# Altium PCB 000.000.001 rev.1.PcbDoc
Units mm, origin at the board's own origin, x right, y up, seen from the top; angles counter-clockwise.
Board outline 111 x 55 mm, 2 copper layers (Top Layer, Bottom Layer), stack 1.571 mm thick; 65 components, 74 nets, 295 pads, 221 vias.
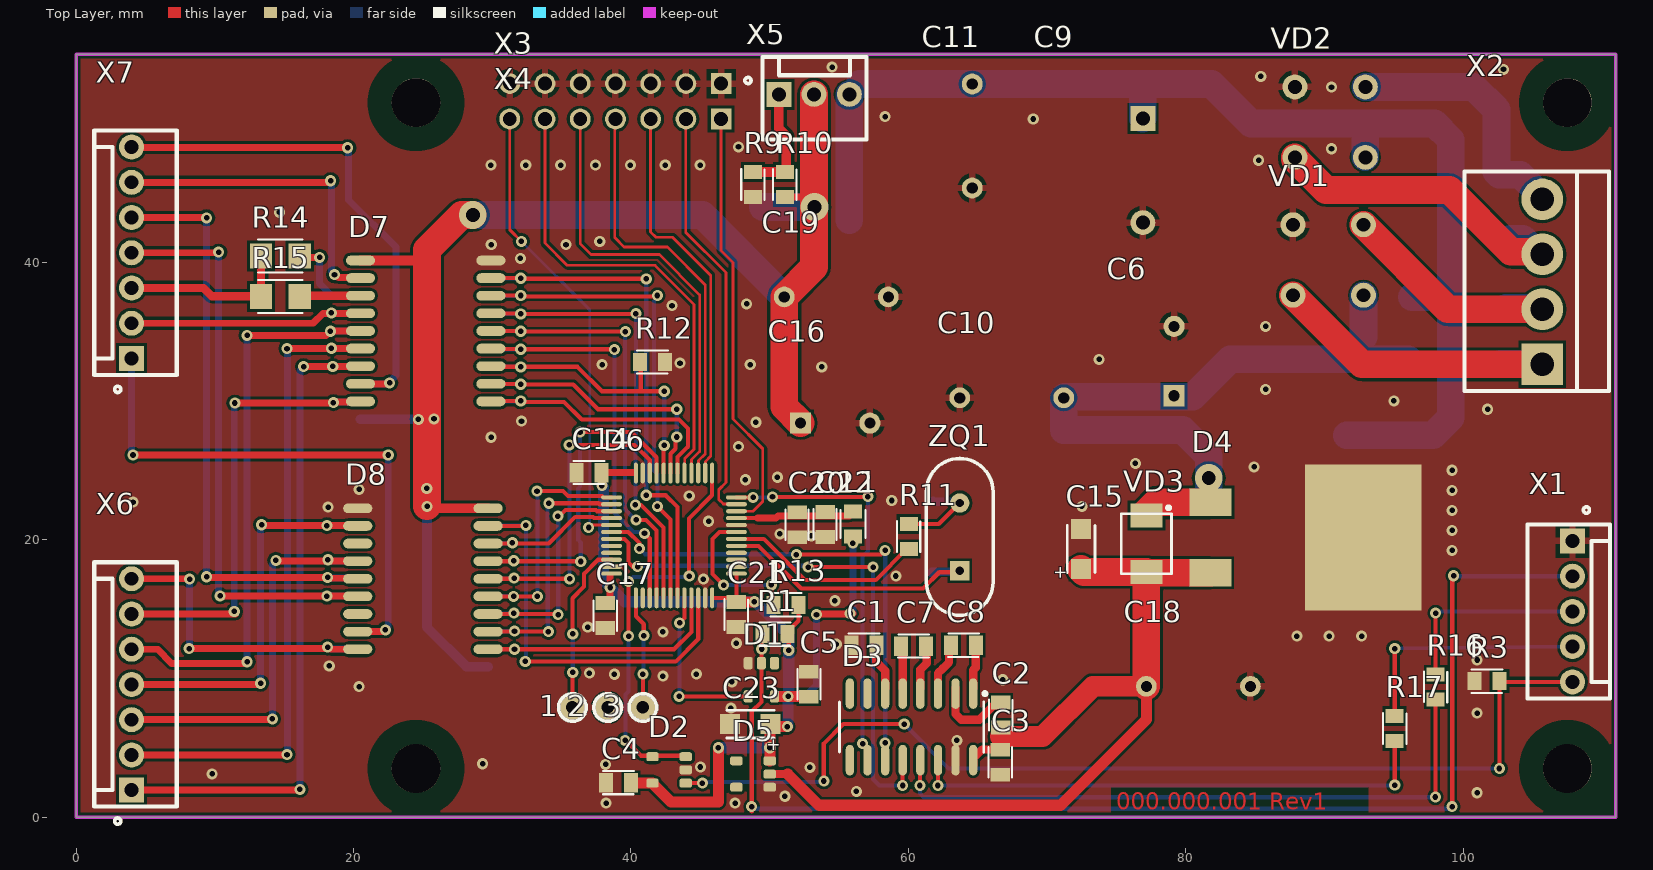
[diagram p0: Top Layer view]
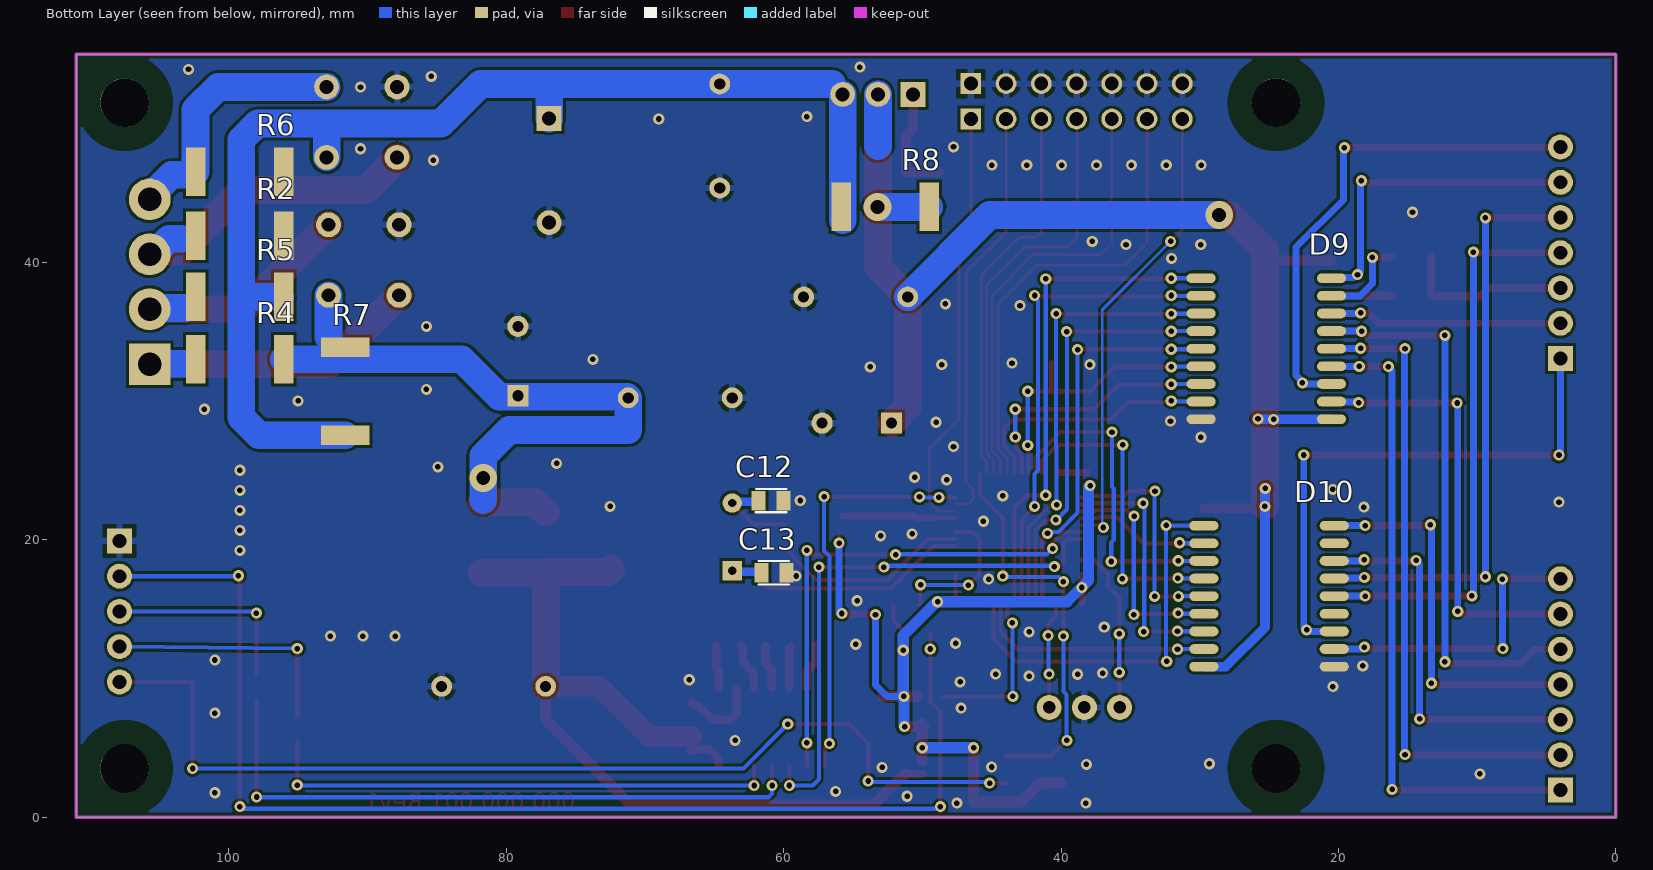
[diagram p1: Bottom Layer view, seen from below]
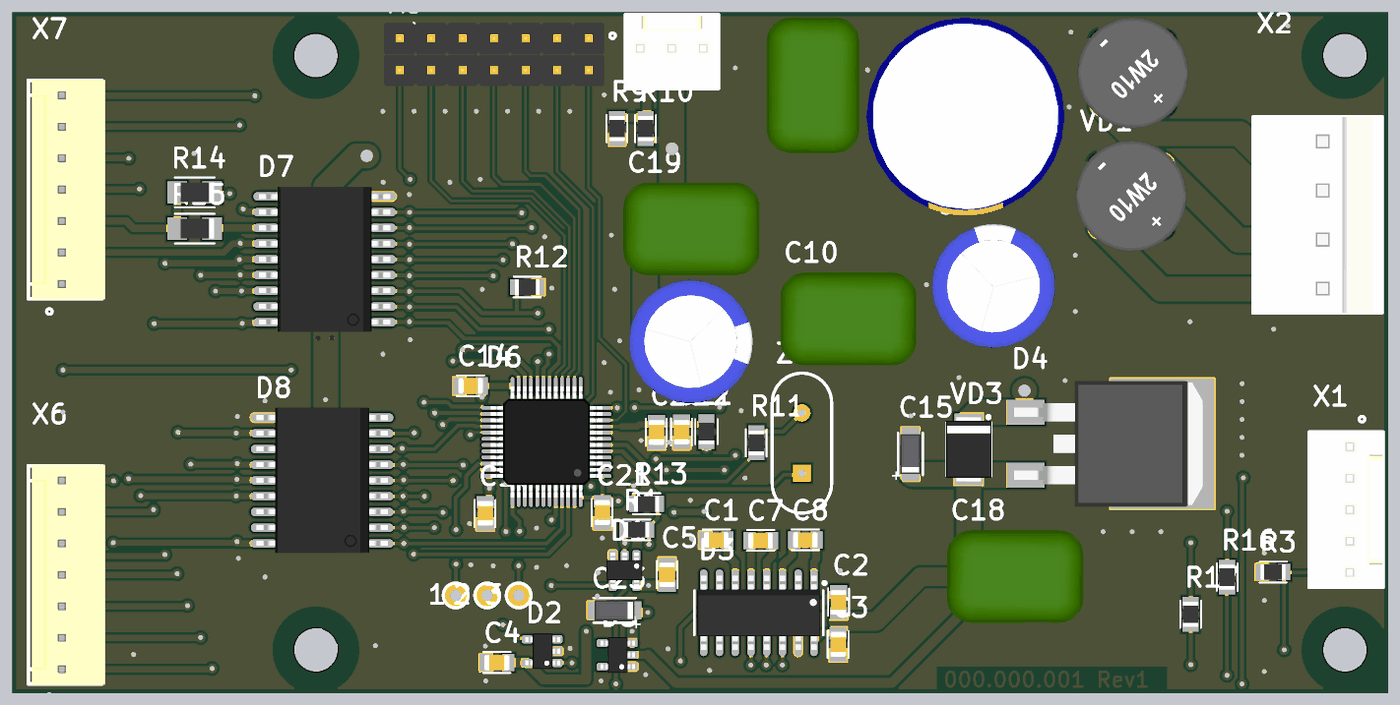
[diagram p2: 3D render of the assembled board from above, using the file's embedded part models]
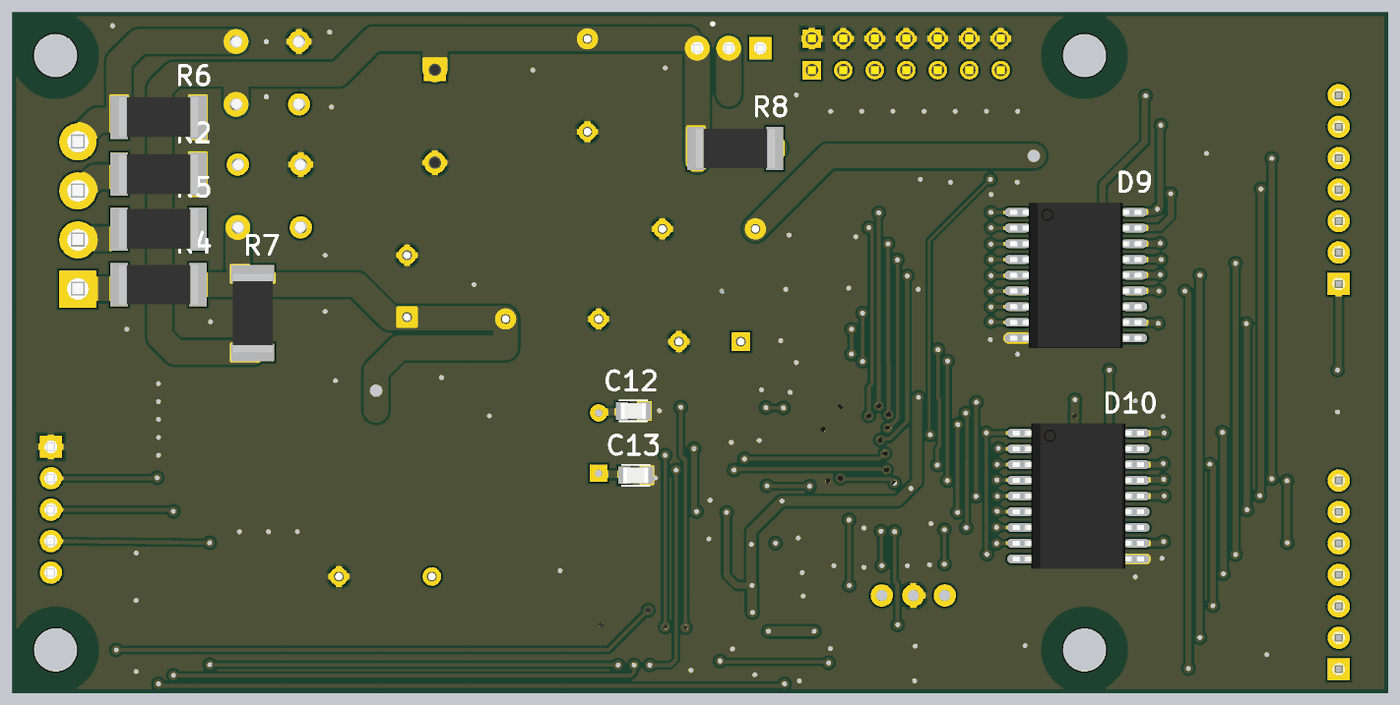
[diagram p3: 3D render of the assembled board from below, using the file's embedded part models]

## Layer stack, top to bottom
Top Solder: solder mask 0.0102, Solder Resist, Dk 3.5
Top Layer: signal copper 0.0356
Dielectric 1: dielectric 1.5, FR-4, Dk 4.8
Bottom Layer: signal copper 0.0356
Bottom Solder: solder mask 0.0102, Solder Resist, Dk 3.5

## Board outline
0,0 111,0 111,55 0,55

## Design rules (kind name [scope] priority, off if disabled: settings)
Clearance [All] p1: gap=0.2 ignorepadtopadclearanceinfootprint=FALSE except(0.3: Arc-Poly)
ComponentClearance [All] p1: gap=0 collisioncheckmode=3 verticalgap=0 showdistances=FALSE
Height [All] p1: minheight=0 maxheight=50 prefheight=12.7
PolygonConnect [All] p1: thpad.connectstyle=Relief thpad.reliefconductorwidth=0.5 thpad.reliefentries=4 thpad.polygonreliefangle="90 Angle" thpad.airgapwidth=0.3 smdpad.connectstyle=Direct smdpad.reliefconductorwidth=0.254 smdpad.reliefentries=4 smdpad.polygonreliefangle="90 Angle" smdpad.airgapwidth=0.254 via.connectstyle=Direct via.reliefconductorwidth=0.254 via.reliefentries=4 via.polygonreliefangle="90 Angle" via.airgapwidth=0.254
RoutingVias [All] p1: holewidth=0.4 width=0.8 viastyle="Through Hole" minholewidth=0.4 minwidth=0.8 maxholewidth=3 maxwidth=5
SolderMaskExpansion [All] p1: expansion=0.102
Width [All] p1: maxlimit=3 minlimit=0.2 preferedwidth=0.5
28 further rules are at their usual default settings.

## Components (designator, comment, footprint, x,y, rotation, side; value= is the part's Value field where it differs from the comment)
1 "=Value" PADROUND 35.775,7.9 r180 top
2 "=Value" PADROUND 38.315,7.9 r180 top
3 "=Value" PADROUND 40.855,7.9 r180 top
C1 "GRM21BR71H104KA01L (0805 X7R 0,1 мкФ ±10% 50 В)" CAP0805-125 56.8,12.375 r0 top
C2 "GRM21BR71H104KA01L (0805 X7R 0,1 мкФ ±10% 50 В)" CAP0805-125 66.65,7.35 r270 top
C3 "GRM21BR71E105KA99L (0805 X7R 1 мкФ ±10% 25 В)" CAP0805-125 66.625,3.95 r90 top
C4 "GRM21BR71H104KA01L (0805 X7R 0,1 мкФ ±10% 50 В)" CAP0805-125 39.1,2.475 r0 top
C5 "GRM21BR71H104KA01L (0805 X7R 0,1 мкФ ±10% 50 В)" CAP0805-125 52.825,9.575 r270 top
C6 "WLR102M1EG21 (1000 мкФ 25 В 10х21)" CAPR10x21 79.15,32.875 r270 top
C7 "GRM21BR71H104KA01L (0805 X7R 0,1 мкФ ±10% 50 В)" CAP0805-125 60.375,12.325 r0 top
C8 "GRM21BR71H104KA01L (0805 X7R 0,1 мкФ ±10% 50 В)" CAP0805-125 63.975,12.375 r0 top
C9 "TKR222M1VK25 (2200 мкФ 35 В 16х25)" CAPR16X25 76.9,46.6 r90 top
C10 "JFA02A104J (0,1 мкФ, 100 В, 5%)" JFA11x13x7.5 67.45,30.225 r0 top
C11 "JFA02A104J (0,1 мкФ, 100 В, 5%)" JFA11x13x7.5 64.6,49.1 r90 top
C12 "GRM2165C1H180JD01D (0805 NP0 18 пФ ±5% 50 В)" CAP0805-060_NP0 60.9,22.8 r180 bottom
C13 "GRM2165C1H180JD01D (0805 NP0 18 пФ ±5% 50 В)" CAP0805-060_NP0 60.7,17.6 r180 bottom
C14 "GRM21BR71H104KA01L (0805 X7R 0,1 мкФ ±10% 50 В)" CAP0805-125 36.975,24.825 r0 top
C15 "TECAP4.7/10VA10 ( тип А 4,7 мкФ 10 В ±10%)" 3216-18 72.45,19.325 r90 top
C16 "WLR102M1EG21 (1000 мкФ 25 В 10х21)" CAPR10X21 54.725,28.4 r180 top
C17 "GRM21BR71H104KA01L (0805 X7R 0,1 мкФ ±10% 50 В)" CAP0805-125 38.15,14.525 r90 top
C18 "JFA02A104J (0,1 мкФ, 100 В, 5%)" JFA11x13x7.5 80.9,9.425 r180 top
C19 "JFA02A104J (0,1 мкФ, 100 В, 5%)" JFA11x13x7.5 54.8,37.5 r180 top
C20 "GRM21BR71E105KA99L (0805 X7R 1 мкФ ±10% 25 В)" CAP0805-125 51.975,21.075 r90 top
C21 "GRM21BR71H104KA01L (0805 X7R 0,1 мкФ ±10% 50 В)" CAP0805-125 47.6,14.6 r90 top
C22 "GRM21BR71H104KA01L (0805 X7R 0,1 мкФ ±10% 50 В)" CAP0805-125 54,21.1 r90 top
C23 "TECAP4.7/10VA10 ( тип А 4,7 мкФ 10 В ±10%)" 3216-18 48.6,6.7 r180 top
D1 "SN74AHC1G14DRLR" SOT23-5 49.4,9.9 r270 top value=SN74LVC1G04DBVR
D2 "LMV321ILT" SOT23-5 42.75,3.4 r180 top
D3 "ST232BDR" SO16_N 60.225,6.5 r270 top
D4 "L78M05ABDT-TR" D2PAK 87.275,20.15 r270 top
D5 "MC78LC33NTRG" SOT23-5 48.8,3.1 r180 top
D6 "STM32F103C8T6" LQFP-48 43.1,20.3 r180 top
D7 "ULN2803ADWR" SOP-18 25.2,35.045 r180 top
D8 "TD62783AFG" SOP-18 25,17.18 r180 top
D9 "ULN2803ADWR" SOP-18 25.2,33.765 r180 bottom
D10 "TD62783AFG" SOP-18 25,15.925 r180 bottom
L1 "LQM21PN4R7NGR (0805 4,7 мкГн 0,8 А 288 мОм)" LQM21-G 56,21.125 r90 top
R1 "RC0805FR-0710KL (0805 10 кОм ±1%)" RES0805-050 50.375,13.2 r180 top
R2 "RC2512FR-070RL (1206 0 Ом)" RES2512-055 99.2,41.92 r0 bottom
R3 "RC0805FR-07150RL (0805 150 Ом ±1%)" RES0805-050 101.7,9.8 r180 top
R4 "RC2512FR-070RL (1206 0 Ом)" RES2512-055 99.2,33 r0 bottom
R5 "RC2512FR-070RL (1206 0 Ом)" RES2512-055 99.2,37.5 r0 bottom
R6 "RC2512FR-070RL (1206 0 Ом)" RES2512-055 99.2,46.52 r0 bottom
R7 "RC2512FR-070RL (1206 0 Ом)" RES2512-055 91.6,30.7 r90 bottom
R8 "RC2512FR-070RL (1206 0 Ом)" RES2512-055 52.675,44 r180 bottom
R9 "RC0805FR-071K6L (0805 1,6 кОм ±1)" RES0805-050 48.8,45.6 r90 top
R10 "RC0805FR-07150RL (0805 150 Ом ±1%)" RES0805-050 51.1,45.6 r90 top
R11 "RC0805JR-0722R (0805 22 Ом ±5%)" RES0805-050 60.025,20.225 r90 top
R12 "RC0805FR-0710KL (0805 10 кОм ±1%)" RES0805-050 41.55,32.8 r0 top
R13 "RC0805FR-0710KL (0805 10 кОм ±1%)" RES0805-050 51.175,15.3 r0 top
R14 "RC1206FR-071KL (1206 1 кОм ±1%)" RES1206-055 14.725,40.45 r180 top
R15 "RC1206FR-071KL (1206 1 кОм ±1%)" RES1206-055 14.725,37.525 r180 top
R16 "RC0805FR-07240RL (0805 240 Ом ±1%)" RES0805-050 97.993,9.372 r270 top
R17 "RC0805FR-07240RL (0805 240 Ом ±1%)" RES0805-050 95.047,6.375 r270 top
VD1 "2W10G-E4/51" 2W10 90.26,40.16 r180 top
VD2 "2W10G-E4/51" 2W10 90.4,50.1 r180 top
VD3 "S1G" DO-214AA 77.15,19.7 r270 top
X1 "DS1070-5MVV6 (WF-05)" WF-05 107.875,14.825 r270 top
X2 "DS1072-4MVT6 (PWL-4)" PWL-4 105.7,38.591 r270 top
X3 "Соединитель штыревой PLS-7" PLS-2.54-7 46.5,52.876 r270 top
X4 "Соединитель штыревой PLS-7" PLS-2.54-7 46.5,50.325 r270 top
X5 "Connector 3" WF-03 53.2,52.1 r0 top value="DS1070-3MVV6 (WF-03)"
X6 "#NAME?" WF-07 4,9.56 r90 top value="DS1070-7MVV6 (WF-7)"
X7 "#NAME?" WF-07 4,40.68 r90 top value="DS1070-7MVV6 (WF-7)"
ZQ1 "8.000MHzHC-49US" KX-3H_spacer 63.7,20.2 r90 top

## Footprints (in the part's own frame and the unit in brackets; to place one, negate y for a bottom-side part, rotate by r counter-clockwise, add the part's x,y. Pads: shape width x height; smd on the part's side, far side on the other; paste and mask are expansions set on the pad)
2W10 [mm]
  round 1.8 hole 1: +(-2.54,2.54) -(2.54,-2.54) ~A(2.54,2.54) ~B(-2.54,-2.54)
  body extent -4.5,-4.5 4.5,4.5, height 7.3
3216-18 [mm] "Case A Tantalum"
  rect 1.45x1.45 smd: 1(-1.45,0) 2(1.45,0)
  silkscreen extent -1.7,-1 1.7,1, body extent -1.6,-0.8 1.6,0.8, height 1.53
CAP0805-060_NP0 [mm] "Chip capacitor, Body 2.0x1.2mm"
  rect 1x1.4 smd: 1(-0.9,0) 2(0.9,0)
  silkscreen extent -1.11,-0.83 1.1,0.85, body extent -1,-0.63 1,0.62, height 0.52
CAP0805-125 [mm] "Chip capacitor, Body 2.0x1.2mm 1.25 mm thickness"
  rect 1x1.4 smd: 1(-0.9,0) 2(0.9,0)
  silkscreen extent -1.11,-0.83 1.1,0.85, body extent -1,-0.63 1,0.63, height 1.42
CAPR10x21 [mm] "Pitch 5.0"
  rect 1.524x1.524 hole 0.8: 1(2.5,0)
  round 1.524 hole 0.8: 2(-2.5,0)
  body extent -5,-5 5,5, height 21.05
CAPR10X21 [mm] "Pitch 5.0"
  rect 1.524x1.524 hole 0.8: 1(2.5,0)
  round 1.524 hole 0.8: 2(-2.5,0)
  body extent -5,-5 5,5, height 21.05
CAPR16X25 [mm] "Pitch 7.5"
  rect 1.8x1.8 hole 1: 1(3.75,0)
  round 1.8 hole 1: 2(-3.75,0)
  body extent -8.01,-8 8,8, height 25.51
D2PAK [mm] "D2-PAK/TO-263-AB; 3 Leads (1 Cropped); Body 15.5 (inc. leads) x 10.5 mm (LxW max)"
  rect 2x3 smd: 1(-2.54,-5.5) 3(2.54,-5.5)
  rect 10.55x8.4 smd: 2(0,5.5)
  body extent -5.08,-6.5 5.08,8.76, height 4.88
DO-214AA [mm] "Diode"
  rect 1.72x2.3 smd: A(2.035,0) K(-2.035,0)
  silkscreen extent -2.72,-1.81 2.16,1.81, body extent -2.65,-1.85 2.65,1.85, height 2.2
JFA11x13x7.5 [mm] "JFA Mylar capacitor"
  round 1.5 hole 0.8: 1(-3.75,0) 2(3.75,0)
  body extent -5.5,-3.75 5.5,3.75, height 15
KX-3H_spacer [mm] "Quartz resonator with spacer"
  rect 1.4x1.4 hole 0.6: 1(-2.44,0)
  round 1.4 hole 0.6: 2(2.44,0)
  silkscreen extent -5.65,-2.4 5.65,2.4, body extent -5.68,-2.5 5.68,2.5, height 4.6
LQFP-48 [mm]
  oval 1.5x0.3 smd: 1(-4.5,2.75) 2(-4.5,2.25) 3(-4.5,1.75) 4(-4.5,1.25) 5(-4.5,0.75) 6(-4.5,0.25) 7(-4.5,-0.25) 8(-4.5,-0.75) 9(-4.5,-1.25) 10(-4.5,-1.75) 11(-4.5,-2.25) 12(-4.5,-2.75) 25(4.5,-2.75) 26(4.5,-2.25) 27(4.5,-1.75) 28(4.5,-1.25) 29(4.5,-0.75) 30(4.5,-0.25) 31(4.5,0.25) 32(4.5,0.75) 33(4.5,1.25) 34(4.5,1.75) 35(4.5,2.25) 36(4.5,2.75)
  oval 0.3x1.5 smd: 13(-2.75,-4.5) 14(-2.25,-4.5) 15(-1.75,-4.5) 16(-1.25,-4.5) 17(-0.75,-4.5) 18(-0.25,-4.5) 19(0.25,-4.5) 20(0.75,-4.5) 21(1.25,-4.5) 22(1.75,-4.5) 23(2.25,-4.5) 24(2.75,-4.5) 37(2.75,4.5) 38(2.25,4.5) 39(1.75,4.5) 40(1.25,4.5) 41(0.75,4.5) 42(0.25,4.5) 43(-0.25,4.5) 44(-0.75,4.5) 45(-1.25,4.5) 46(-1.75,4.5) 47(-2.25,4.5) 48(-2.75,4.5)
  body extent -4.5,-4.5 4.5,4.5, height 1.5
LQM21-G [mm] "Inductor"
  rect 1x1.3 smd: 1(-0.9,0) 2(0.9,0)
  silkscreen extent -1,-0.9 1,0.9, body extent -1,-0.62 1,0.63, height 0.82
PADROUND [mm] "Pad Round"
  round 1.8 hole 0.9: 1(0,0)
  silkscreen extent -1,-1 1,1
PLS-2.54-7 [mm]
  rect 1.5x1.5 hole 1: 1(0,0)
  round 1.5 hole 1: 2(0,-2.54) 3(0,-5.08) 4(0,-7.62) 5(0,-10.16) 6(0,-12.7) 7(0,-15.24)
  body extent -1.27,-16.51 1.27,1.27, height 8.54
PWL-4 [mm] "3.96"
  rect 3x3 hole 1.7: 1(5.94,0)
  round 3 hole 1.7: 2(1.98,0) 3(-1.98,0) 4(-5.94,0)
  silkscreen extent -7.96,-5.6 7.88,4.8, body extent -7.95,-5.59 7.89,4.81, height 13.8
RES0805-050 [mm] "Chip Resistor, Body 2.0x1.2mm, IPC High Density"
  rect 1x1.3 smd: 1(-0.9,0) 2(0.9,0)
  silkscreen extent -1.11,-0.83 1.1,0.85, body extent -1,-0.63 1,0.62, height 0.42
RES1206-055 [mm] "Chip resistor"
  rect 1.6x1.8 smd: 1(-1.4,0) 2(1.4,0)
  silkscreen extent -1.6,-1.2 1.6,1.2, body extent -1.55,-0.8 1.55,0.8, height 0.47
RES2512-055 [mm] "Resistor"
  rect 1.4x3.5 smd: 1(-3.175,0) 2(3.175,0)
  body extent -3.18,-1.6 3.17,1.6, height 0.57
SO16_N [mm] "SOIC, 16-Leads, Body 9.9x3.9mm, Pitch 1.27mm, IPC Medium Density"
  oval 2.2x0.6 smd: 1(-2.4,4.445) 2(-2.4,3.175) 3(-2.4,1.905) 4(-2.4,0.635) 5(-2.4,-0.635) 6(-2.4,-1.905) 7(-2.4,-3.175) 8(-2.4,-4.445) 9(2.4,-4.445) 10(2.4,-3.175) 11(2.4,-1.905) 12(2.4,-0.635) 13(2.4,0.635) 14(2.4,1.905) 15(2.4,3.175) 16(2.4,4.445)
  silkscreen extent -2.52,-5.2 1.8,5.42, body extent -3,-4.96 3,4.96, height 1.54
SOP-18 [mm]
  oval 2.1x0.7 smd: 1(-4.7,5.08) 2(-4.7,3.81) 3(-4.7,2.54) 4(-4.7,1.27) 5(-4.7,0) 6(-4.7,-1.27) 7(-4.7,-2.54) 8(-4.7,-3.81) 9(-4.7,-5.08) 10(4.7,-5.08) 11(4.7,-3.81) 12(4.7,-2.54) 13(4.7,-1.27) 14(4.7,0) 15(4.7,1.27) 16(4.7,2.54) 17(4.7,3.81) 18(4.7,5.08)
  body extent -5.3,-5.87 5.3,5.88, height 2.57
SOT23-5 [mm]
  rrect50% 0.9x0.65 smd: 1(-1.2,0.95) 2(-1.2,0) 3(-1.2,-0.95) 4(1.2,-0.95) 5(1.2,0.95)
  body extent -1.45,-1.45 1.35,1.45, height 1.37
WF-03 [mm] "2.54"
  rect 1.8x1.8 hole 1: 1(-2.54,0)
  round 1.8 hole 1: 2(0,0) 3(2.54,0)
  silkscreen extent -4.99,-3.25 3.77,2.7, body extent -3.73,-3.2 3.77,2.6, height 11.62
WF-05 [mm] "2.54"
  rect 1.8x1.8 hole 1: 1(-5.08,0)
  round 1.8 hole 1: 2(-2.54,0) 3(0,0) 4(2.54,0) 5(5.08,0)
  silkscreen extent -7.53,-3.25 6.27,2.7, body extent -6.35,-3.17 6.35,2.63, height 11.64
WF-07 [mm] "2.54"
  rect 1.8x1.8 hole 1: 1(-7.62,0)
  round 1.8 hole 1: 2(-5.08,0) 3(-2.54,0) 4(0,0) 5(2.54,0) 6(5.08,0) 7(7.62,0)
  silkscreen extent -10.07,-3.25 8.81,2.7, body extent -8.89,-3.5 8.89,2.4, height 11.48

## Part data
1 2 3: library part Point
C1 C2 C3 C4 C5 C7 C8 C10 C11 C12 C13 C14 C17 C18 C19 C20 C21 C22: library part Capacitor
  C1 C2 C3 C4 C5 C7 C8 C14 C17 C20 C21 C22: Cost=7, Visible="0,1 мк"
  C10 C11 C18 C19: Cost=6, Visible="0,1 мк"
  C12 C13: Cost=6, Visible=18
C6 C9 C15 C16 C23: library part CAP_POL
  C6 C16: Cost=16, Visible="1000 мк"
  C9: Cost=40, Visible="2200 мк"
  C15 C23: Cost=8, Visible="4,7 мк"
D4: library part LM7805CV, Cost=15
D5: library part MC78LC00
D7 D9: library part ULN2803, Cost=55
D8 D10: library part UTC62783, Cost=47
L1: library part L, Cost=14, Visible="4,7 мкГн"
R1 R2 R3 R4 R5 R6 R7 R8 R9 R10 R11 R12 R13 R14 R15 R16 R17: library part Resistor
  R1 R12 R13: Cost=0.9, Visible="10 к"
  R2 R4 R5 R6 R7 R8: Cost=0,9, Visible=0
  R3 R10: Cost=0.9, Visible=150
  R9: Cost=0,9, Visible="1.6 k"
  R11: Cost=0.9, Visible=22
  R14 R15: Cost=0.8, Visible="1 к"
  R16 R17: Cost=0.9, Visible=240
VD1 VD2: library part "Diode bridge", "Diode", Cost=27
VD3: library part Diode, "Diode", Cost=3
X1: library part "Connector 5", Cost=6
X2: library part "Connector 4", Cost=6
X3 X4: library part PLS-7
X6 X7: library part Connector_7, Cost=6
ZQ1: library part Quartz, Cost=15
D1: Cost=6
D2: Cost=14
D3: Cost=22
D6: Cost=220
X5: Cost=5

## Free pads (board coordinates)
  round 3.5 hole 3.5 unplated: MH(24.5,3.5) MH(24.5,51.5) MH(107.5,3.5) MH(107.5,51.5)

## Via types
v1: diameter 0.8, hole 0.4, Top Layer to Bottom Layer, tented both sides, 218 vias
v2: diameter 2, hole 1, Top Layer to Bottom Layer, tented both sides, 3 vias

## Nets (pads, with @x,y where several pads share a name; then routed paths per layer and width w, separated by ;. In a path a pad name is that pad's centre, name@x,y a point inside that pad or via, vN(x,y) a via of type N, cw(c..) or ccw(c..) an arc to the next point about the centre after c; other vN are vias at no path point)
3,3: C4.2 C5.2 C14.2 C17.2 C21.2 C23.1 D1.5 D2.5 D5.3 D6.1 D6.24 D6.36 D6.48 L1.1 R1.1 R13.2 | length 78.4
  Top Layer w0.3: D6.24 D6.24@40.35,24.825 ; D6.48 47.3,15.8 C21.2 D6.1 ; v1(51.375,12.025) 51.375,13.1 R1.1 51.275,13.35 52.075,14.15 R13.2 ; v1(56,19.75) L1.1
  Top Layer w0.5: C14.2@38.125,24.825 D6.24@40.25,24.825 ; D6.36@38.475,17.425 38.475,15.45 C17.2@38.5,15.425 ; v1(53.375,14.6) 53.413,14.637 55.963,14.637 v1@56,14.675
  Top Layer w0.8: C4.2 40.013,2.462 41.537,2.462 D2.5 41.55,2.425 42.875,1.1 46.3,1.1 v1(46.3,5) ; C21.2 v1@48.9,15.5 ; D5.3 50.025,4.075 C23.1@50.025,6.525 ; C23.1 C23.1@50.025,6.675 ; D1.5 v1(51.325,8.7) C5.2@52.825,8.7 ; v1(51.275,6.525) C23.1@50.025,6.525 ; C23.1@50.025,6.525 49.875,6.525 C23.1@50.025,6.675 ; C23.1@50.025,6.525 C23.1@50.025,6.675
  Bottom Layer w0.5: v1(51.325,8.7) 52.55,8.7 53.375,9.525 v1(53.375,14.6) ; v1@56,14.675 v1(56,19.75)
  Bottom Layer w0.8: v1(37.9,23.9) 38.025,23.775 38.025,17.05 39.55,15.525 v1(48.9,15.525) 48.925,15.525 51.375,13.075 v1(51.375,12.025) 51.375,8.75 v1(51.325,8.7) v1@51.325,6.525 ; v1(46.3,5) v1(50,5)
  other v1: 55.8,14.675 38.5,16.55
5,0: C2.2 C3.2 C15.1 C18.2 D3.16 D4.3 D5.2 VD3.A | length 66.8
  Top Layer w0.6: D5.2 51.3,3.1 ; D3.16@64.67,3.7 D3.16 64.67,4.225 65.32,4.875 66.6,4.875 C3.2
  Top Layer w0.8: 51.3,3.1 53.55,0.85 70.975,0.85 77.15,7.025 C18.2 ; C3.2 66.637,4.862 66.637,5.8
  Top Layer w1.5: 66.637,5.8 69.675,5.8 73.3,9.425 C18.2
  Top Layer w2: C15.1 72.66,17.665 VD3.A VD3.A@77.15,17.624 ; VD3.A@76.775,17.625 VD3.A@77.15,17.624 ; C18.2 VD3.A@77.15,17.624 ; D4.3 VD3.A@77.15,17.624
A: D7.15 D9.14 X6.2 | length 47.9
  Top Layer w0.5: X6.2 v1@15.2,4.48 ; v1(15.2,33.765) 15.205,33.77 20.495,33.77 D7.15
  Bottom Layer w0.5: v1(15.2,4.5) 15.25,4.55 15.25,33.715 v1(15.2,33.765) ; v1(18.4,33.8) 18.417,33.783 20.483,33.783 D9.14
AN0: D8.18 D10.11 X6.7 | length 23.6
  Top Layer w0.5: X6.7 v1@8.13,17.18 ; v1(8.15,12.15) 18.025,12.15 v1(18.125,12.25) 18.206,12.25 18.356,12.1 D8.18
  Bottom Layer w0.5: v1(8.15,12.15) 8.175,12.175 v1(8.175,17.15) ; v1(18.125,12.25) 18.206,12.25 18.341,12.115 D10.11
AN1: D8.11 D10.18 X6.4 | length 30.1
  Top Layer w0.5: X6.4 v1@13.21,9.56 ; v1@13.3,9.56 v1@13.21,9.56 ; v1(13.3,9.65) v1@13.21,9.56 ; v1@13.375,21.028 v1@13.422,21.028 ; v1(13.375,21.075) v1@13.422,21.028 ; D8.11 20.262,21.028 v1@13.422,21.028
  Bottom Layer w0.5: v1(13.3,9.65) 13.3,21 v1(13.375,21.075) ; v1(18.075,21.015) 20.29,21.015 D10.18
AN2: D8.13 D10.16 X6.3 | length 29.8
  Top Layer w0.5: X6.3 14.095,7.02 v1(14.15,7.075) ; v1@14.4,18.475 v1@14.425,18.475 ; v1(14.4,18.5) v1@14.425,18.475 ; D8.13 20.275,18.475 v1@14.425,18.475
  Bottom Layer w0.5: v1(14.15,7.075) 14.15,18.25 v1(14.4,18.5) ; v1(18.15,18.55) 18.235,18.465 D10.16
AN3: D8.14 D10.15 X7.5 | length 44.3
  Top Layer w0.5: X7.5 v1@9.225,43.22 ; v1@9.38,43.22 v1(9.4,43.2) ; v1@9.4,17.275 v1(18.125,17.275) 18.182,17.218 20.262,17.218 D8.14
  Bottom Layer w0.5: v1(9.4,17.325) v1(9.4,43.2) ; v1(18.125,17.275) 18.167,17.233 20.262,17.233 D10.15
AN4: D8.15 D10.14 X7.4 | length 43.3
  Top Layer w0.5: X7.4 v1@10.23,40.68 ; v1@10.275,40.68 v1@10.23,40.68 ; v1(10.275,40.725) v1@10.23,40.68 ; v1@10.375,15.93 v1@10.395,15.93 ; v1(10.375,15.95) v1@10.395,15.93 ; D8.15 20.28,15.93 v1@10.395,15.93
  Bottom Layer w0.5: v1(10.275,40.725) 10.275,16.05 v1(10.375,15.95) ; v1(18.075,15.925) D10.14
AN5: D8.17 D10.12 X7.1 | length 42.2
  Top Layer w0.5: v1(4.1,26.1) v1(22.5,26.1) ; D8.17 22.17,13.37 v1(22.3,13.5)
  Bottom Layer w0.5: X7.1 4,26.2 v1(4.1,26.1) ; D10.12 22.185,13.385 v1(22.3,13.5) 22.5,13.7 v1(22.5,26.1)
ANODE0: D6.45 D8.1 D10.8 | length 19.5
  Top Layer w0.3: D8.1 v1(31.6,12.1) 43.1,12.1 44.35,13.35 D6.45
  Bottom Layer w0.3: D10.8 29.707,12.107 31.593,12.107 v1(31.6,12.1)
ANODE1: D6.46 D8.8 D10.1 | length 31.4
  Top Layer w0.3: D8.8 v1@32.39,20.99 ; v1(32.375,11.225) 43.23,11.225 44.85,12.845 44.85,14.312 D6.46 ; v1@32.425,20.99 v1@32.39,20.99 ; v1(32.425,21.025) v1@32.39,20.99
  Bottom Layer w0.3: D10.1 29.71,21.015 32.415,21.015 v1(32.425,21.025) 32.425,11.275 v1(32.375,11.225)
ANODE2: D6.21 D8.6 D10.3 | length 25
  Top Layer w0.3: D8.6 29.713,18.438 36.362,18.438 v1(36.375,18.425) ; v1@36.7,27.75 40.037,27.75 41.85,25.937 D6.21
  Bottom Layer w0.3: D10.3 31.54,18.465 v1(31.55,18.475) ; v1@36.325,18.475 36.375,18.525 36.375,19.799 36.201,19.973 36.201,23.696 36.325,23.821 v1(36.325,27.75)
ANODE3: D6.22 D8.5 D10.4 | length 24.6
  Top Layer w0.3: D8.5 35.57,17.18 v1(35.575,17.175) ; v1(35.55,26.825) 40.255,26.825 41.35,25.73 D6.22
  Bottom Layer w0.3: D10.4 29.715,17.21 31.56,17.21 v1(31.575,17.225) ; v1(35.55,26.825) 35.563,26.812 35.563,17.187 v1(35.575,17.175)
ANODE4: D6.25 D8.4 D10.5 | length 18.6
  Top Layer w0.3: D8.4 v1(31.54,15.91) v1(33.25,15.91) ; v1(33.225,23.5) 35.1,23.5 35.45,23.15 37.9,23.15 38,23.05 D6.25
  Bottom Layer w0.3: D10.5 31.525,15.925 v1(31.54,15.91) ; v1(33.225,23.5) 33.25,23.475 v1(33.25,15.91)
ANODE5: D6.26 D8.2 D10.7 | length 20.1
  Top Layer w0.3: D8.2 34.045,13.37 v1(34.05,13.375) ; v1(34.075,22.625) 34.076,22.626 37.676,22.626 37.752,22.55 D6.26
  Bottom Layer w0.3: D10.7 29.708,13.393 31.592,13.393 v1(31.6,13.4) ; v1(34.05,13.375) 34,13.425 34,14.913 34,18.639 33.975,18.664 33.975,22.39 34.075,22.49 v1(34.075,22.625)
ANODE6: D6.27 D8.3 D10.6 | length 18.1
  Top Layer w0.3: D8.3 34.71,14.64 v1(34.75,14.6) ; v1(34.725,21.7) 34.86,21.7 35.286,22.126 37.469,22.126 37.545,22.05 D6.27
  Bottom Layer w0.3: D10.6 31.515,14.655 v1(31.56,14.7) ; v1(34.725,21.7) 34.75,21.675 v1(34.75,14.6)
ANODE7: D6.28 D8.7 D10.2 | length 11.5
  Top Layer w0.3: D8.7 31.45,19.72 34.07,19.72 35.976,21.626 37.261,21.626 37.337,21.55 D6.28
  Bottom Layer w0.3: D10.2 31.41,19.735 v1(31.45,19.775)
B: D7.16 D9.13 X6.1 | length 48.9
  Top Layer w0.5: X6.1 16.065,1.94 v1(16.125,2) ; v1(16.4,32.478) 16.414,32.491 v1(18.5,32.491) 20.486,32.491 D7.16
  Bottom Layer w0.5: v1(16.125,2) 16.125,32.203 v1(16.4,32.478) ; v1(18.5,32.491) 18.502,32.493 20.498,32.493 D9.13
BOOT: D1.2 R1.2 X1.2 | length 89
  Top Layer w0.3: v1@48.7,0.4 48.7,7.6 49.4,8.3 D1.2 49.4,13.125 R1.2 ; v1@99.2,0.7 99.2,17.3 v1(99.3,17.4)
  Bottom Layer w0.3: v1@48.7,0.6 v1@99.2,0.6 ; v1(99.3,17.4) 99.335,17.365 X1.2
  other v1: 48.7,0.75 99.2,0.75 49.425,12.115
BOOT0: D1.4 D6.44 | length 12.2
  Top Layer w0.3: v1(43.475,8.7) D1.4 ; v1(43.5,14) 43.85,14.35 D6.44
  Bottom Layer w0.3: v1(43.475,8.7) 43.5,8.725 v1(43.5,14)
C: D7.13 D9.16 X7.2 | length 18.9
  Top Layer w0.5: X7.2 17.075,35.6 17.79,36.315 D7.13
  Bottom Layer w0.5: v1(18.4,36.35) 18.445,36.305 D9.16
CATH1: D6.18 D7.1 D9.8 | length 20.5
  Top Layer w0.3: D7.1 29.917,29.983 32.033,29.983 v1(32.05,30) ; v1@32.1,29.92 35.18,29.92 36.45,28.65 43.45,28.65 44.1,28 44.1,26.7 43.35,25.95 D6.18
  Bottom Layer w0.3: D9.8 v1@31.895,29.955 ; v1@32.255,29.955 v1@32.3,30
CATH2: D6.19 D7.2 D9.7 | length 20.8
  Top Layer w0.3: D7.2 29.918,31.218 32.032,31.218 v1(32.05,31.2) ; v1@32.1,31.19 35.835,31.19 37.625,29.4 v1@43.1,29.4 ; D6.19 42.85,26.189 43.211,26.55 43.211,27.311 v1(43.3,27.4)
  Bottom Layer w0.3: D9.7 29.913,31.213 v1@31.945,31.213 ; v1@32.287,31.213 v1@32.3,31.2 ; v1@43.1,29.4 43.3,29.2 v1(43.3,27.4)
  other v1: 43.3,29.4
CATH3: D6.20 D7.3 D9.6 R12.1 | length 22.9
  Top Layer w0.3: D7.3@30.3,32.46 v1@31.975,32.46 ; v1(32.05,32.46) 36.14,32.46 37.9,30.7 40.7,30.7 ; R12.1 40.7,32.75 40.7,30.7 ; D6.20 42.35,26.75 v1(42.4,26.8) ; v1(42.4,30.7) 40.7,30.7
  Bottom Layer w0.3: D9.6 29.918,32.478 v1@31.957,32.478 ; v1@32.282,32.478 v1@32.3,32.46 ; v1(42.4,26.8) v1(42.4,30.7)
CATH4: D6.39 D7.4 D9.5 | length 30.3
  Top Layer w0.3: D7.4 29.925,33.75 32.025,33.75 v1(32.05,33.725) ; v1@32.1,33.73 38.77,33.73 v1(38.8,33.7) ; v1(40.975,20.45) 41.35,20.075 D6.39
  Bottom Layer w0.3: D9.5 29.94,33.725 v1@31.9,33.725 ; v1(38.8,33.7) 38.8,21.939 40.194,20.546 40.879,20.546 v1(40.975,20.45)
CATH5: D6.40 D7.5 D9.4 | length 32.3
  Top Layer w0.3: D7.5 29.91,35.035 32.04,35.035 v1(32.05,35.025) ; v1@32.1,35 v1(39.6,35) ; v1(40.375,21.425) 41.075,21.425 41.85,20.65 D6.40
  Bottom Layer w0.3: D9.4 v1@31.94,35.035 ; v1@32.29,35.035 v1@32.3,35.025 ; v1(39.6,35) 39.57,34.97 39.57,22.189 40.334,21.425 v1(40.375,21.425)
CATH6: D6.41 D7.6 D9.3 | length 34.2
  Top Layer w0.3: D7.6 29.923,36.293 v1@32.028,36.293 ; v1(32.05,36.27) v1@32.3,36.27 ; v1@32.277,36.293 v1@32.3,36.27 ; v1(40.32,22.5) 40.725,22.5 42.35,20.875 D6.41 ; v1(40.35,36.3) 40.32,36.27 v1@32.3,36.27
  Bottom Layer w0.3: D9.3 29.918,36.288 v1@32.032,36.288 ; v1@32.282,36.288 v1@32.3,36.27 ; v1(40.32,22.5) 40.32,26.72 40.35,26.75 v1(40.35,36.3)
CATH7: D6.42 D7.7 D9.2 | length 36.5
  Top Layer w0.3: D7.7 29.907,37.593 32.043,37.593 v1(32.05,37.6) ; v1@32.1,37.54 41.74,37.54 41.8,37.6 v1(41.9,37.6) ; v1(41.9,22.4) 42.85,21.45 D6.42
  Bottom Layer w0.3: D9.2 v1@31.975,37.575 ; v1@32.275,37.575 v1@32.3,37.6 ; v1(41.9,22.4) 41.9,24.721 41.65,24.971 41.65,37.215 41.9,37.465 v1(41.9,37.6)
CATH8: D6.43 D7.8 D9.1 | length 38
  Top Layer w0.3: D7.8 29.905,38.85 32.045,38.85 v1(32.05,38.845) ; v1@32.1,38.81 40.88,38.81 40.89,38.8 v1(41.1,38.8) ; v1(41.1,23.2) 42.5,23.2 43.35,22.35 D6.43
  Bottom Layer w0.3: D9.1 v1@31.975,38.845 ; v1(41.1,23.2) v1(41.1,38.8)
D: D7.11 D9.18 X7.6 | length 25.2
  Top Layer w0.5: X7.6 18.234,45.76 v1(18.35,45.876) ; v1(18.625,39.1) 18.706,39.1 18.913,38.893 20.462,38.893 D7.11
  Bottom Layer w0.5: v1(18.35,45.876) 18.4,45.826 18.4,39.325 v1(18.625,39.1) 18.706,39.1 18.923,38.883 20.462,38.883 D9.18
DBG1: D6.10 X4.1 | length 31.4
  Top Layer w0.2: X4.1@46.495,50.7 46.495,40.841 47.35,39.986 47.35,28.7 49.5,26.55 49.5,22.76 48.79,22.05 D6.10
DBG2: D6.11 X4.2 | length 30.3
  Top Layer w0.2: X4.2@43.95,50.325 43.95,42.15 46.85,39.25 46.85,24.125 46.325,23.6 46.325,22.9 46.656,22.569 47.581,22.569 D6.11
DBG3: D6.14 X4.3 | length 28.2
  Top Layer w0.2: X4.3@41.415,50.325 41.415,42.185 41.8,41.8 43,41.8 45.75,39.05 45.75,26.017 45.369,25.636 45.369,24.819 D6.14
DBG4: D6.15 X4.4 | length 30.2
  Top Layer w0.2: X4.4@38.825,50.3 38.825,41.775 39.5,41.1 42.62,41.1 45.35,38.37 45.35,26.182 44.869,25.701 44.869,24.819 D6.15
DBG5: D6.16 X4.5 | length 32.2
  Top Layer w0.2: X4.5@36.335,50.325 36.335,41.34 37.125,40.55 42.05,40.55 44.95,37.65 44.95,26.348 44.369,25.767 44.369,24.819 D6.16
DBG6: D6.17 X4.6 | length 34
  Top Layer w0.2: X4.6@33.795,50.325 33.795,41.385 35.405,39.775 41.725,39.775 44.55,36.95 44.55,26.514 43.869,25.833 43.869,24.819 D6.17
DBG7: D6.29 X4.7 | length 33.6
  Top Layer w0.2: X4.7 31.26,42.34 v1(32.1,41.5) ; v1(36.951,20.876) 37.125,21.05 D6.29
  Bottom Layer w0.2: v1(32.1,41.5) 37.025,36.575 37.025,20.95 v1(36.951,20.876)
DP: R14.2 R15.2 X7.3 | length 12.4
  Top Layer w0.6: X7.3 9.175,38.14 ; 9.185,38.14 9.775,37.55 ; 9.8,37.55 13.3,37.55 13.325,37.575 R14.2
E: D7.17 D9.12 X7.7 | length 38.2
  Top Layer w0.5: X7.7 4.025,48.275 19.55,48.275 v1(19.575,48.25) ; D7.17 22.535,31.235 v1(22.6,31.3)
  Bottom Layer w0.5: v1(19.575,48.25) 19.65,48.175 19.65,44.5 23.05,41.1 23.05,31.85 v1@22.55,31.35 ; D9.12 v1@22.425,31.225
F: D7.18 D9.11 X6.6 | length 33.9
  Top Layer w0.5: X6.6 v1@11.215,14.64 ; v1(11.4,14.825) v1@11.215,14.64 ; v1(11.45,29.85) 18.525,29.85 v1(18.55,29.875) 18.602,29.927 20.462,29.927 D7.18 ; v1@11.5,14.64 v1@11.215,14.64
  Bottom Layer w0.5: v1(11.4,14.825) 11.4,29.8 v1(11.45,29.85) ; v1(18.55,29.875) 18.592,29.917 20.462,29.917 D9.11
G: D7.14 D9.15 X6.5 | length 42.9
  Top Layer w0.5: X6.5 5.85,12.1 6.875,11.075 v1@12.2,11.075 ; v1@12.325,11.075 v1@12.2,11.075 ; v1(12.325,11.2) v1@12.2,11.075 ; v1(12.325,34.725) 18.025,34.725 v1(18.325,35.025) 18.335,35.035 20.49,35.035 D7.14
  Bottom Layer w0.5: v1(12.325,11.2) v1(12.325,34.725) ; v1(18.325,35.025) 18.33,35.03 20.495,35.03 D9.15
GND: 2.1 C1.1 C3.1 C4.1 C5.1 C6.2 C9.2 C10.1 C11.1 C12.2 C13.2 C14.1 C15.2 C16.2 C17.1 C18.1 C19.1 C20.1 C21.1 C22.1 C23.2 D1.3 D2.2 D3.15 D4.2 D5.1 D6.8 D6.23 D6.35 D6.47 D7.9 D8.10 D9.9 D10.10 R2.1 R3.2 R6.1 R9.1 R12.2 VD1.- VD2.- X1.1 X3.1 X3.2 X3.3 X3.4 X3.5 X3.6 X3.7
  other v1: 38.2,1 47.5,1 51.1,1.5 101,1.75 56.25,1.85 9.8,3.118 52.9,3.575 45,3.61 38.165,3.8 29.3,3.846 63.5,5.525 101,7.5 47.2,7.852 20.4,9.4 47.273,9.745 66.8,9.9 42.3,10.162 38.8,10.296 44.717,10.3 37,10.374 18.248,10.9 101,11.324 54.8,12.457 47.6,12.533 88,13.05 90.333,13.05 92.667,13.05 42.3,13.35 36.884,13.7 54.7,15.592 45.213,17.15 59.1,17.38 99.2,19.225 53,20.264 50.734,20.413 99.2,20.669 45.6,21.325 99.2,22.112 18.166,22.35 72.5,22.4 4.1,22.7 58.8,22.823 44.2,23.15 99.2,23.556 20.4,23.619 48.25,24.318 50.558,24.5 99.2,25 84.924,25.25 76.364,25.5 47.75,26.712 29.91,27.379 49,28.466 32.108,28.55 101.75,29.4 95,30 85.75,30.83 53.75,32.46 37.922,32.62 48.6,32.62 43.534,32.72 73.75,33 85.75,35.375 42.958,36.87 48.331,37 32.032,40.279 29.925,41.268 35.314,41.268 37.75,41.5 14.661,43.6 29.9,47 32.414,47 34.928,47 37.441,47 39.955,47 42.469,47 44.983,47 85.25,47.348 90.5,48.179 47.75,48.316 69,50.325 58.325,50.5 90.5,52.627 85.4,53.4 102.9,53.9 54.5,54.06
LOOP: D2.1 R3.1 X1.5 | length 74.9
  Top Layer w0.3: D2.1 v1(45.15,2.45) ; v1(53.9,2.6) 53.9,5.3 55.3,6.7 v1(59.7,6.7) ; v1(102.6,3.5) R3.1 102.655,9.745 X1.5
  Bottom Layer w0.3: v1(45.15,2.45) 45.225,2.525 53.825,2.525 v1(53.9,2.6) ; v1(59.7,6.7) 62.9,3.5 v1(102.6,3.5)
LOWPOWER: C6.1 C10.2 D4.1 R4.1 R7.2 VD1.+ VD3.K | length 50.6
  Top Layer w2: VD3.K@77.15,21.96 77.16,21.96 77.89,22.69 D4.1
  Bottom Layer w2: 81.65,22.85 81.65,26.025 79.775,27.9 71.2,27.9 C10.2 71.275,30.3 80.5,30.3 83.2,33 R4.1 ; 92.8,34.6 VD1.+
  other v2: 81.65,24.438
NetC1_2: C1.2 D3.6 | length 3.4
  Top Layer w0.6: C1.2 57.675,12.35 57.675,11.2 58.32,10.555 D3.6@58.32,9.3
NetC2_1: C2.1 D3.2 | length 5.8
  Top Layer w0.6: D3.2@63.4,9.3 D3.2 63.4,7.425 63.805,7.02 65.12,7.02 66.15,8.05 66.45,8.05 C2.1
NetC7_1: C7.1 D3.5 | length 3.1
  Top Layer w0.6: C7.1 59.59,12.21 D3.5@59.59,9.3
NetC7_2: C7.2 D3.4 | length 3.2
  Top Layer w0.6: D3.4@60.86,9.3 60.86,10.635 61.325,11.1 61.325,12.275 C7.2
NetC8_1: C8.1 D3.3 | length 3.5
  Top Layer w0.6: D3.3@62.13,9.3 62.13,10.374 62.481,10.725 62.5,10.725 62.925,11.15 62.925,12.225 C8.1
NetC8_2: C8.2 D3.1 | length 3.2
  Top Layer w0.6: D3.1@64.67,9.3 64.67,10.595 64.85,10.775 64.85,12.35 C8.2
NetC12_1: C12.1 R11.2 ZQ1.2 | length 6.3
  Top Layer w0.3: R11.2 62.185,21.125 ZQ1.2
  Bottom Layer w0.6: C12.1 61.88,22.72 63.62,22.72 ZQ1.2
NetD7_12: D7.12 R15.1 | length 4.4
  Top Layer w0.6: R15.1 16.185,37.585 D7.12
NetD9_17: D9.17 R14.1 | length 6.6
  Top Layer w0.5: R14.1@16.225,40.45 16.325,40.35 v1(17.55,40.35)
  Bottom Layer w0.5: v1(17.55,40.35) 17.55,38.475 18.45,37.575 D9.17
NetR2_2: R2.2 VD2.~A X2.3 | length 23.6
  Top Layer w2: VD2.~A 87.86,47.44 90.1,45.2 99,45.2 103.449,40.751 105.509,40.751 X2.3@105.7,40.56
  Bottom Layer w2: 103.4,41.7 104.289,41.7 105.429,40.56 X2.3@105.7,40.56
NetR4_2: R4.2 VD1.~A X2.1 | length 23.1
  Top Layer w2: VD1.~A 92.7,32.64 X2.1@105.7,32.64
  Bottom Layer w2: R4.2@102.7,32.675 105.665,32.675 X2.1@105.7,32.64
NetR5_2: R5.2 VD1.~B X2.2 | length 18.1
  Top Layer w2: VD1.~B 98.9,36.6 X2.2@105.7,36.6
  Bottom Layer w2: 103.1,36.7 105.6,36.7 X2.2@105.7,36.6
NetR6_2: R6.2 VD2.~B X2.4 | length 18.9
  Bottom Layer w2: VD2.~B 100.76,52.64 102.4,51 102.4,46.545 R6.2 102.595,46.3 104.1,46.3 105.509,44.891 105.509,44.711 X2.4@105.7,44.52
NetR9_2: R9.2 R10.2 X5.1 | length 8.1
  Top Layer w0.7: R9.2 R10.2 ; X5.1 50.66,49.64 51.2,49.1 R10.2@51.2,46.5
NetR16_1: R16.1 X1.3 | length 14.2
  Top Layer w0.3: R16.1 98,10.279 v1(98,14.7)
  Bottom Layer w0.3: v1@98.125,14.825 X1.3
NetR17_1: R17.1 X1.4 | length 17.7
  Top Layer w0.3: R17.1 95.06,7.289 v1(95.06,12.15)
  Bottom Layer w0.3: v1(95.06,12.15) X1.4
NRST: D6.7 R13.1 | length 10.6
  Top Layer w0.3: v1(46.675,16.725) 45.875,17.525 45.875,20.05 46.375,20.55 D6.7 ; v1(50.125,16.75) 50.125,15.45 R13.1
  Bottom Layer w0.3: v1(46.675,16.725) 50.1,16.725 v1(50.125,16.75)
OSC_IN: C13.1 D6.5 ZQ1.1 | length 20.1
  Top Layer w0.3: D6.5 49.2,19.55 52.275,16.475 61.05,16.475 62.225,17.65 63.59,17.65 ZQ1.1
  Bottom Layer w0.6: C13.1 61.68,17.68 63.62,17.68 ZQ1.1
OSC_OUT: D6.6 R11.1 | length 14.6
  Top Layer w0.3: D6.6 49.575,20.05 52.525,17.1 57.65,17.1 59.875,19.325 R11.1 R11.1@60.05,19.325
PWR: C9.1 C11.2 R5.1 R7.1 R8.1 VD2.+ X5.3 | length 89.1
  Bottom Layer w2: R8.1@55.74,43.05 X5.3 ; 56.49,52.85 C11.2 76.9,52.85 ; C9.1 76.9,52.85 ; R7.1 97.825,27.525 99.1,28.8 99.1,37.495 ; VD2.+ 92.94,50 ; R5.1@96.3,37.495 99.1,37.495 ; 76.9,52.85 81.85,52.85 84.7,50 92.94,50 ; 92.94,50 97.928,50 99.1,48.828 99.1,37.495
RX1: D3.13 R16.2 | length 46
  Top Layer w0.3: v1(60.825,2.275) 60.842,2.292 60.842,3.682 D3.13@60.86,3.7 ; v1(97.993,1.448) R16.2@97.993,8.422
  Bottom Layer w0.3: v1@60.825,1.975 60.825,1.7 61.1,1.425 v1@98,1.425
SWCLK: 3.1 D6.37 | length 8.2
  Top Layer w0.3: D6.37 40.35,14.475 40.925,13.9 v1(40.925,13.075) ; 3.1 v1(40.855,10.3)
  Bottom Layer w0.3: v1(40.855,10.3) 40.89,10.335 40.89,13.04 v1(40.925,13.075)
SWDIO: 1.1 D6.34 | length 12.4
  Top Layer w0.3: 1.1 35.788,7.913 35.788,10.413 v1(35.8,10.425) ; v1(35.8,13.2) 35.775,13.225 35.775,15.775 36.612,16.612 36.612,17.537 37.625,18.55 D6.34
  Bottom Layer w0.3: v1(35.8,10.425) v1(35.8,13.2)
TX1: D3.14 R17.2 | length 37.5
  Top Layer w0.3: v1(62.125,2.275) 62.13,2.28 D3.14@62.13,3.7 ; R17.2 95.06,5.462 v1(95.06,2.3)
  Bottom Layer w0.3: v1(62.125,2.275) 62.138,2.288 v1@95.06,2.288
U_LED: C16.1 C19.2 D7.10 D8.9 D9.10 D10.9 R8.2 R10.1 X5.2 | length 112.5
  Top Layer w0.5: R10.1 v2@53.2,44.7
  Top Layer w0.7: D7.10 24.775,40.125 25.3,40.65 ; v1@25.5,22.26 D8.9
  Top Layer w2: v1(25.3,22.4) 25.3,28.7 25.3,40.65 25.3,40.9 27.8,43.4 v2(28.6,43.4) ; C16.1 51.05,29.575 C19.2 53.2,39.65 53.2,44.7 X5.2
  Bottom Layer w0.7: D9.10 v1@25.8,28.685 ; v1(25.275,23.7) 25.288,23.688 25.288,22.413 v1(25.3,22.4) 25.3,13.675 28.13,10.845 D10.9
  Bottom Layer w2: v2(28.6,43.4) 45.15,43.4 C19.2 ; R8.2 49.525,43.975 v2(53.225,43.975) ; 53.2,48.375 X5.2
  other v1: 24.675,28.675 25.8,28.7
USART1_RX: D3.12 D6.31 | length 39.9
  Top Layer w0.3: D6.31 39.525,20.05 39.825,19.75 39.825,18.35 40.125,18.05 v1(40.475,18.05) ; v1(52.775,18.025) v1(57.45,18.025) ; v1@59.575,2.15 v1(59.575,2.275) 59.582,2.282 59.582,3.692 D3.12@59.59,3.7
  Bottom Layer w0.3: v1(40.475,18.05) 40.54,18.115 52.685,18.115 v1(52.775,18.025) ; v1(57.45,18.025) 57.45,2.725 57.9,2.275 v1(59.575,2.275) v1@59.575,2.15
USART1_TX: D3.11 D6.30 | length 36.3
  Top Layer w0.3: D6.30 39.8,20.55 40.6,19.75 v1(40.6,19.357) ; v1(51.925,18.925) 58.025,18.925 v1(58.325,19.225) ; D3.11@58.32,3.7 58.322,3.702 58.322,5.347 v1(58.325,5.35)
  Bottom Layer w0.3: v1(40.6,19.357) 41.007,18.95 51.7,18.95 v1@51.875,18.775 ; v1(58.325,5.35) v1(58.325,19.225)
USART2_RX: D2.3 D2.4 D6.13 | length 29.1
  Top Layer w0.3: v1(39.575,5.525) 39.625,5.525 40.725,4.425 43.875,4.425 D2.3 ; v1(39.825,13.05) v1(39.825,16.975) ; v1(44.2,17.365) 44.175,17.39 44.175,21.525 45.85,23.2 D6.13
  Bottom Layer w0.3: v1(39.575,5.525) 39.605,5.555 39.605,8.836 39.825,9.056 v1(39.825,13.05) ; v1(39.825,16.975) 40.15,17.3 44.135,17.3 v1(44.2,17.365)
USART2_TX: D3.10 D6.12 | length 29.2
  Top Layer w0.3: D6.12 v1(48.8,23.05) ; v1(50.201,23.076) 57.051,23.076 v1(57.075,23.1) ; v1(56.7,5.3) 57.05,4.95 D3.10@57.05,3.7
  Bottom Layer w0.3: v1(48.8,23.05) 50.15,23.05 50.176,23.076 v1(50.201,23.076) ; v1(56.7,5.3) 56.7,18.813 57.075,19.188 v1(57.075,23.1)
VDDA: C20.2 C22.2 D6.9 L1.2 | length 8.2
  Top Layer w0.3: D6.9 49.125,21.55
  Top Layer w0.5: 49.125,21.55 50.45,21.55 50.6,21.7 L1.2@55.75,21.7
pads on no net: D1.1 D3.7 D3.8 D3.9 D5.4 D5.5 D6.2 D6.3 D6.4 D6.32 D6.33 D6.38 D8.12 D8.16 D10.13 D10.17

## Polygon pours and split planes (outlines as drawn)
GND on Top Layer "Top Layer-GND" (solid, pour order 2): 0.2,0.2 0.2,54.8 110.8,54.8 110.8,0.2
no net on Top Layer "Top Layer-No Net" (solid, pour order 0): 0.2,49.8
GND on Bottom Layer "Bottom Layer-GND" (solid, pour order 4): 0.2,0.2 0.2,54.8 110.8,54.8 110.8,0.2

## Keep-outs
Keep-Out Layer:
  the board outline again, w0.254

## Other copper
Top Layer:
  pour cut-out: 21,3.5 ccw(c24.5,3.5) 24.5,0 ccw(c24.5,3.5) 28,3.5 ccw(c24.5,3.5) 24.5,7 ccw(c24.5,3.5)
  pour cut-out: 21,51.5 ccw(c24.5,51.5) 24.5,48 ccw(c24.5,51.5) 28,51.5 ccw(c24.5,51.5) 24.5,55 ccw(c24.5,51.5)
  pour cut-out: 104,51.5 ccw(c107.5,51.5) 107.5,48 ccw(c107.5,51.5) 111,51.5 ccw(c107.5,51.5) 107.5,55 ccw(c107.5,51.5)
  pour cut-out: 104,3.5 ccw(c107.5,3.5) 107.5,0 ccw(c107.5,3.5) 111,3.5 ccw(c107.5,3.5) 107.5,7 ccw(c107.5,3.5)
  text "000.000.001 Rev1" at 74.981,0.533 h1.2
Bottom Layer:
  pour cut-out: 104,3.5 ccw(c107.5,3.5) 107.5,0 ccw(c107.5,3.5) 111,3.5 ccw(c107.5,3.5) 107.5,7 ccw(c107.5,3.5)
  pour cut-out: 104,51.5 ccw(c107.5,51.5) 107.5,48 ccw(c107.5,51.5) 111,51.5 ccw(c107.5,51.5) 107.5,55 ccw(c107.5,51.5)
  pour cut-out: 21,51.5 ccw(c24.5,51.5) 24.5,48 ccw(c24.5,51.5) 28,51.5 ccw(c24.5,51.5) 24.5,55 ccw(c24.5,51.5)
  pour cut-out: 21,3.5 ccw(c24.5,3.5) 24.5,0 ccw(c24.5,3.5) 28,3.5 ccw(c24.5,3.5) 24.5,7 ccw(c24.5,3.5)

## Text inside footprints (layer, text, board x,y; h text height)
C6: Assembly Top (Mech8) "+" at 78.75,29.175 h1.8 r270
C9: Assembly Top (Mech8) "+" at 77.2,52.8 h1.8 r90
C15: Top Overlay "+" at 71.65,17.125 h1.52 r90
C16: Assembly Top (Mech8) "+" at 51.025,28.8 h1.8 r180
C23: Top Overlay "+" at 50.8,5.9 h1.52 r180
VD1: Assembly Top (Mech8) "+" at 92.96,38.26 h2.5 r180; Assembly Top (Mech8) "-" at 88.16,43.16 h2.5 r180
VD2: Assembly Top (Mech8) "+" at 93.1,48.2 h2.5 r180; Assembly Top (Mech8) "-" at 88.3,53.1 h2.5 r180